# EAGLE board CheckBatteryVoltage12VoltsWithReset(for future) (EAGLE 9.5.2)
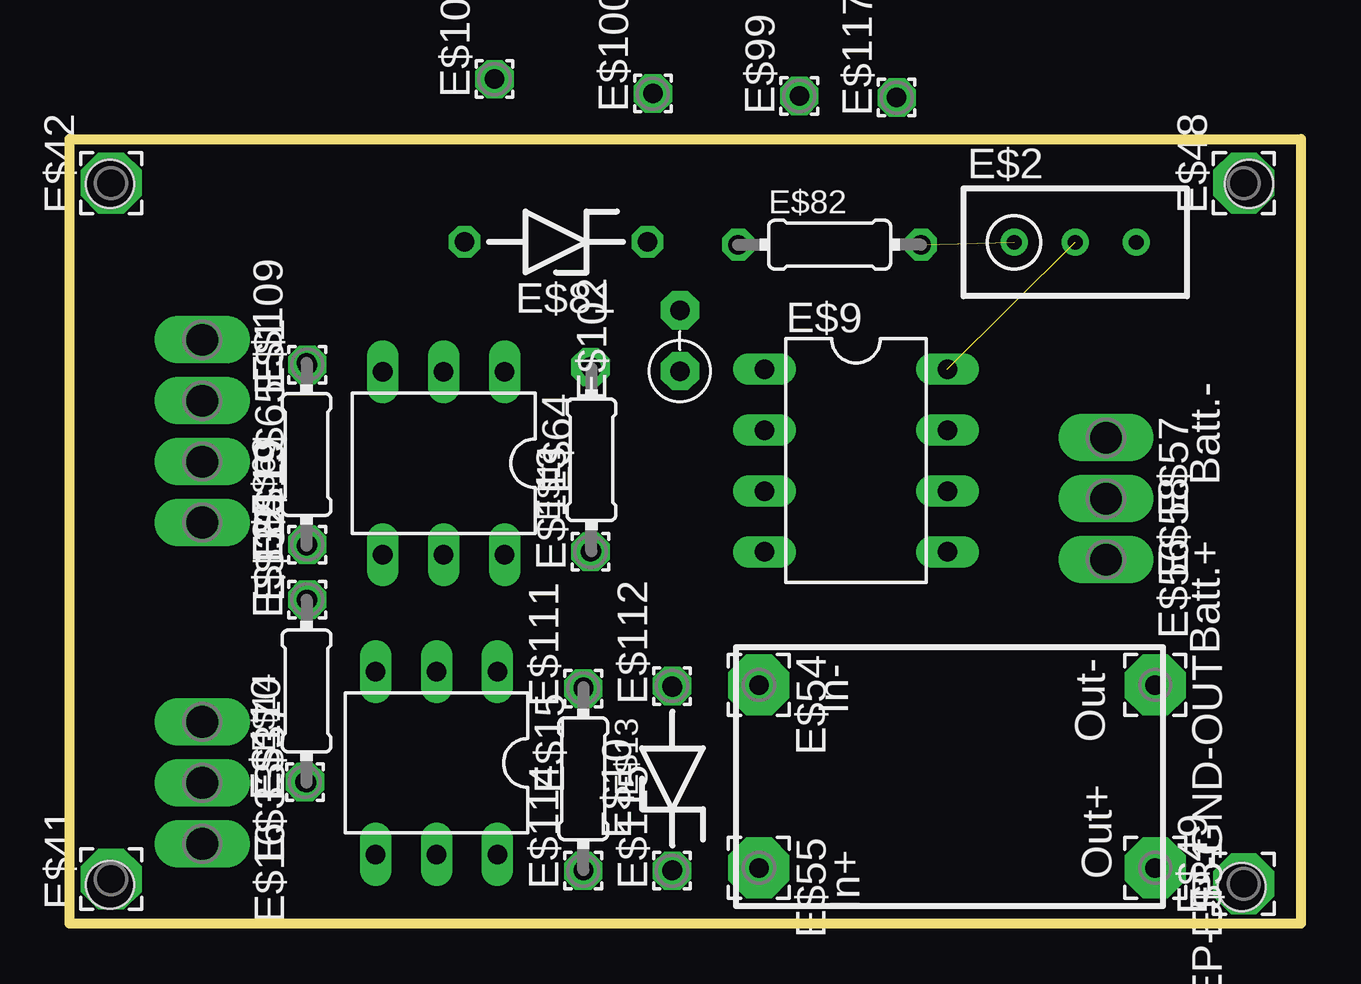
[diagram p0: board, top side]
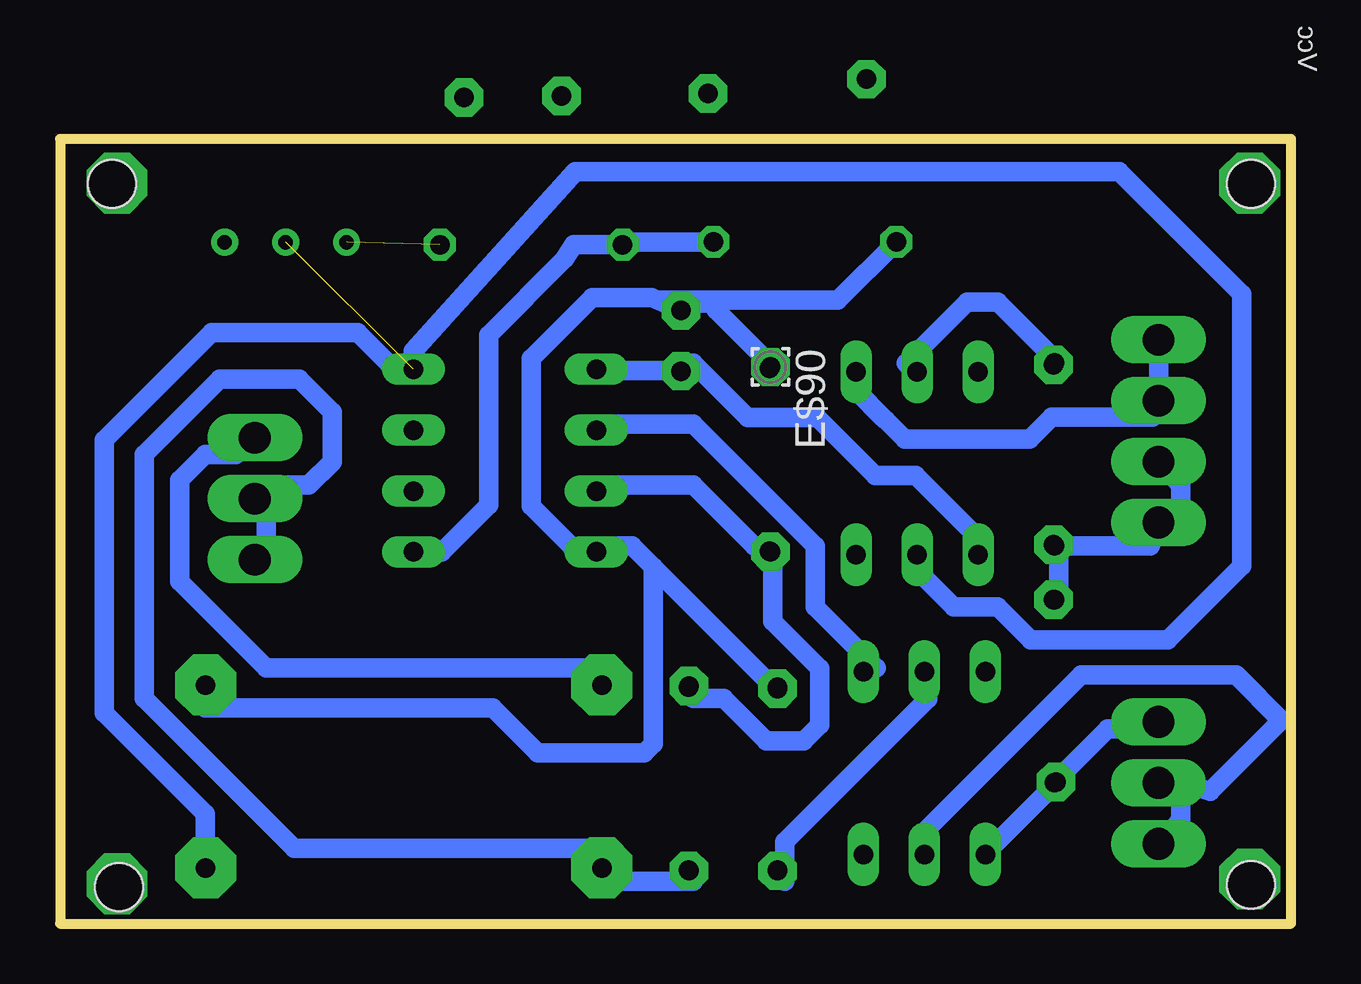
[diagram p1: board, bottom side, seen from below]

Size 51.3 x 32.7 mm. Coordinates in mm from the lower left corner, seen from the top.
Outline: 0,0 0,32.7 51.3,32.7 51.3,0 0,0
Copper layers (1*16): Top 0.035mm / dielectric 1.5mm / Bottom 0.035mm
Design rules "default": minimum track width 10mil, minimum drill 24mil, track to track 8mil, track to pad 8mil, pad to pad 8mil, via to via 8mil, smd to smd 8mil, copper to edge 40mil, drill to drill 8mil, minimum pad ring 10mil, minimum via ring 8mil, stop-mask expansion 4mil, vias tented up to drill 0mil, thermal gap 10mil
Holes 2 mm at 48.83,1.51 49.13,30.84 1.68,30.84 1.68,1.62

## Footprints (pad centres in the part's own frame; a part is rotated, then mirrored left to right if it is on the bottom)
P1-13Y = drill 1.321 pad 1.905 long: TP 0,0
RTRIM3296W = drill 0.61: 1 0,-2.54; 2 0,0; 3 0,2.54
DIL08 = drill 0.813 long: 1 -3.81,-3.81; 2 -1.27,-3.81; 3 1.27,-3.81; 4 3.81,-3.81; 5 3.81,3.81; 6 1.27,3.81; 7 -1.27,3.81; 8 -3.81,3.81
ZDIO-7.5 = drill 0.813 octagon: A 3.81,0; C -3.81,0
0204/7 = drill 0.813 octagon: 1 -3.81,0; 2 3.81,0
DIL06 = drill 0.813 long: 1 -2.54,-3.81; 2 0,-3.81; 3 2.54,-3.81; 4 2.54,3.81; 5 0,3.81; 6 -2.54,3.81
2,54/0,8 = drill 0.813 pad 2.54 octagon: 1 0,0
1,6/0,8 = drill 0.813 pad 1.6 octagon: 1 0,0
RS-2,5 = drill 0.813 pad 1.6 octagon: 1 -1.27,0; 2 1.27,0

## Placement (x,y rotation side)
E$1  [P1-13Y]  5.52,24.34 270 top
E$2  500  [RTRIM3296W]  41.9,28.4 270 top
E$9  Attiny85  [DIL08]  32.77,19.3 270 top
E$10  zener 10v  [ZDIO-7.5]  25.12,6.04 90 top
E$11  100K  [0204/7]  21.74,19.34 90 top
E$13  220  [0204/7]  21.4,6.04 270 top
E$14  220  [0204/7]  9.87,9.7 90 top
E$15  Til113  [DIL06]  15.29,6.7 180 top
E$16  [P1-13Y]  5.52,3.32 270 top
E$19  [P1-13Y]  5.52,19.25 270 top
E$32  [P1-13Y]  5.52,16.71 270 top
E$33  [P1-13Y]  5.52,5.87 270 top
E$37  [P1-13Y]  5.52,8.4 270 top
E$41  [2,54/0,8]  1.72,1.86 90 top
E$42  [2,54/0,8]  1.72,30.87 90 top
E$48  [2,54/0,8]  48.92,30.87 90 top
E$49  [2,54/0,8]  48.92,1.66 90 top
E$51  [2,54/0,8]  45.23,2.32 270 top
E$54  [2,54/0,8]  28.72,9.94 270 top
E$55  [2,54/0,8]  28.72,2.32 270 top
E$56  [P1-13Y]  43.18,15.17 270 top
E$57  [P1-13Y]  43.18,20.25 270 top
E$58  [P1-13Y]  43.18,17.71 270 top
E$63  220  [0204/7]  9.87,19.55 90 top
E$64  Til113  [DIL06]  15.59,19.19 180 top
E$65  [P1-13Y]  5.52,21.8 270 top
E$81  zener 4.7v  [ZDIO-7.5]  20.27,28.41 180 top
E$82  47  [0204/7]  31.67,28.3 0 top
E$90  [1,6/0,8]  21.7,23.2 270 bottom
E$99  [1,6/0,8]  30.4,34.5 90 top
E$100  [1,6/0,8]  24.3,34.6 90 top
E$101  [1,6/0,8]  17.7,35.2 90 top
E$102  220  [RS-2,5]  25.43,24.3 90 top
E$109  [1,6/0,8]  9.9,23.3 90 top
E$110  [1,6/0,8]  9.8,5.9 90 top
E$111  [1,6/0,8]  21.4,9.8 90 top
E$112  [1,6/0,8]  25.1,9.9 90 top
E$113  [1,6/0,8]  21.7,15.5 90 top
E$114  [1,6/0,8]  21.4,2.2 90 top
E$115  [1,6/0,8]  25.1,2.2 90 top
E$117  [1,6/0,8]  34.46,34.43 90 top
E$119  [1,6/0,8]  9.9,15.8 90 top
E$120  [1,6/0,8]  9.9,13.5 90 top
STEP-UP-GND-OUT  [2,54/0,8]  45.23,9.94 270 top

## Library data of the parts
E$1 E$16 E$19 E$32 E$33 E$37 E$56-E$58 E$65 = testpad
E$2 = rcl
E$9 = 74xx-us
E$10 E$81 = ref-packages-longpad
E$11 E$13 E$14 E$63 E$82 = eagle-ltspice
E$15 E$64 = ic-package
E$41 E$42 E$48 E$49 E$51 E$54 E$55 E$90 E$99-E$101 E$109-E$115 E$117 E$119 E$120 STEP-UP-GND-OUT = wirepad
E$102 = discrete

## Nets
5.1V-STEP-UP: E$2.2 E$9.8 E$51.1 E$64.5
IN-5V-FROM-NANO-SDCARD: E$15.5 E$16.TP E$33.TP
IN-12V-BATTERY: E$10.C E$55.1 E$56.TP E$58.TP
IN-GND-BATTERY: E$54.1 E$57.TP
IN-GND-NANO-SD-CARD: E$14.2 E$19.TP E$32.TP E$63.1
IN-TO-RESET-ATTINY85: E$1.TP E$64.1 E$65.TP
OUT-SERIAL-DATA: E$14.1 E$15.4 E$37.TP
PHOTO-DIODE: E$13.2 E$15.2
S$2: E$2.1 E$82.2
S$5: E$9.1 E$64.4 E$102.1
S$15: E$63.2 E$64.2
STEP-UP-GND: E$9.4 E$11.2 E$13.1 E$81.A E$102.2 STEP-UP-GND-OUT.1
TX-SERIAL-DATA: E$9.2 E$15.1
VZ-ANALOG-REFERENCE: E$9.5 E$81.C E$82.1
VZ-BATTERY-LEVEL: E$9.3 E$10.A E$11.1

## Tracks (layer width: path | path; a pad name or v marks a point on that pad's centre or on a via)
5.1V-STEP-UP  (1 unrouted)
  Bottom 0.813: E$64.5 15.45,15.24 15.66,14.81 14.06,13.2 12.22,13.2 10.85,11.83 5.14,11.83 2.06,14.91 2.06,26.23 7.17,31.34 29.84,31.34 36.57,23.85 E$9.8 37.62,23.36 38.89,24.63 44.97,24.63 49.45,20.15 49.45,8.79 45.24,4.58 45.24,3.04 E$51.1
IN-5V-FROM-NANO-SDCARD
  Bottom 0.813: E$15.5 15.29,3.81 8.74,10.36 2.3,10.36 0.41,8.47 3.38,5.5 4.6,5.88 4.6,5.58 | 4.6,5.58 4.6,4.31 E$16.TP | 4.6,5.58 E$33.TP
IN-12V-BATTERY
  Bottom 0.813: E$56.TP 42.7,15.74 42.7,17.01 E$58.TP 42.7,18.28 40.93,18.28 39.96,19.25 39.96,21.32 41.33,22.69 44.64,22.69 47.78,19.55 47.78,9.39 41.53,3.14 28.73,3.14 E$55.1 28.73,1.77 24.92,1.77 E$10.C
IN-GND-BATTERY
  Bottom 0.813: E$57.TP 43.97,19.55 45.24,19.55 46.31,18.48 46.31,14.27 42.7,10.66 28.73,10.66 E$54.1
IN-GND-NANO-SD-CARD
  Bottom 0.813: 9.68,15.74 9.68,13.2 E$14.2 | 9.68,15.74 5.87,15.74 E$32.TP 4.6,17.01 4.6,18.28 E$19.TP | 9.68,15.74 E$63.1
IN-TO-RESET-ATTINY85
  Bottom 0.813: E$64.1 18.12,22.62 18.07,22.59 18.07,22.16 17.03,21.12 16.9,21 16.1,20.2 10.9,20.2 9.98,21.12 5.76,21.12 E$65.TP E$1.TP
OUT-SERIAL-DATA
  Bottom 0.813: E$15.4 12.75,2.92 9.83,5.83 E$14.1 7.64,8.12 5.87,8.12 E$37.TP
PHOTO-DIODE
  Bottom 0.813: E$13.2 21.11,1.77 21.11,3.41 15.15,9.37 15.29,9.33 E$15.2
S$2  (1 unrouted)
S$5
  Bottom 0.813: E$9.1 28.9,23.06 25.5,23.06 E$102.1 24.92,23.36 22.65,21.09 19.74,21.09 17.33,18.68 15.64,18.68 13.05,16.08 E$64.4
S$15
  Bottom 0.813: E$64.2 16.03,23.36 13.49,25.9 12.22,25.9 9.68,23.36 E$63.2
STEP-UP-GND
  Bottom 0.254: 23.96,25.58 25.45,25.58
  Bottom 0.813: 26.59,14.87 27.46,15.74 28.73,15.74 E$9.4 30,15.74 31.67,17.41 31.67,23.56 29.13,26.1 26.65,26.1 25.45,25.58 | 26.59,14.87 21.68,9.96 21.61,9.85 E$13.1 | 25.45,25.58 26.37,25.98 18.89,25.98 E$81.A 16.46,28.65 | 25.45,25.58 E$102.2 | 26.59,14.87 26.59,7.49 26.96,7.12 31.4,7.12 33.27,8.99 45.25,8.99 STEP-UP-GND-OUT.1 | E$11.2 21.74,23.36 23.96,25.58
TX-SERIAL-DATA
  Bottom 0.813: E$9.2 28.73,20.82 24.92,20.82 19.84,15.74 19.84,13.2 17.3,10.66 E$15.1
VZ-ANALOG-REFERENCE
  Bottom 0.813: E$9.5 35.4,15.49 33.44,17.45 33.44,24.53 30.26,27.71 29.9,28.3 E$82.1 27.74,28.41 E$81.C
VZ-BATTERY-LEVEL
  Bottom 0.813: E$10.A 24.92,9.39 23.65,9.39 21.88,7.62 20.31,7.62 19.64,8.29 19.64,10.63 21.61,12.6 21.61,15.57 E$11.1 22.38,15.74 24.92,18.28 28.73,18.28 E$9.3

## Text on the board
tPlace: Batt.- | Batt.+ | In- | Out- | In+ | Out+
bPlace: Reset | Gnd | Demux | Vcc